# EAGLE board node5 (EAGLE 5.10)
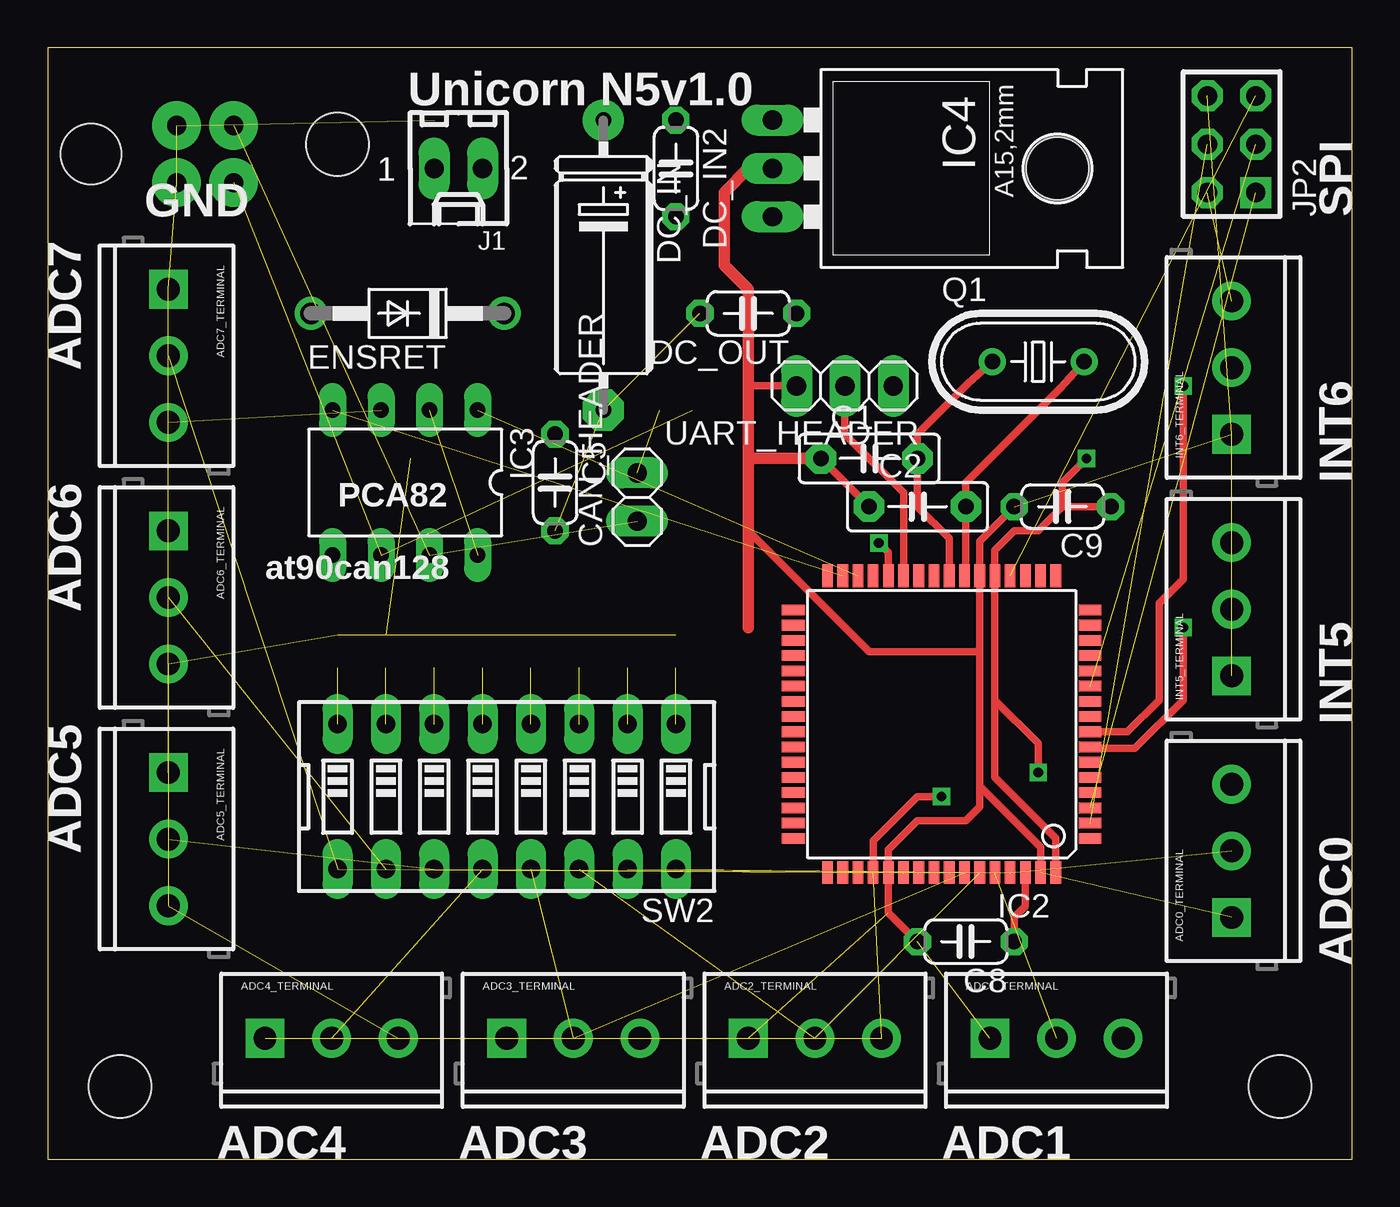
[diagram p0: board, top side]
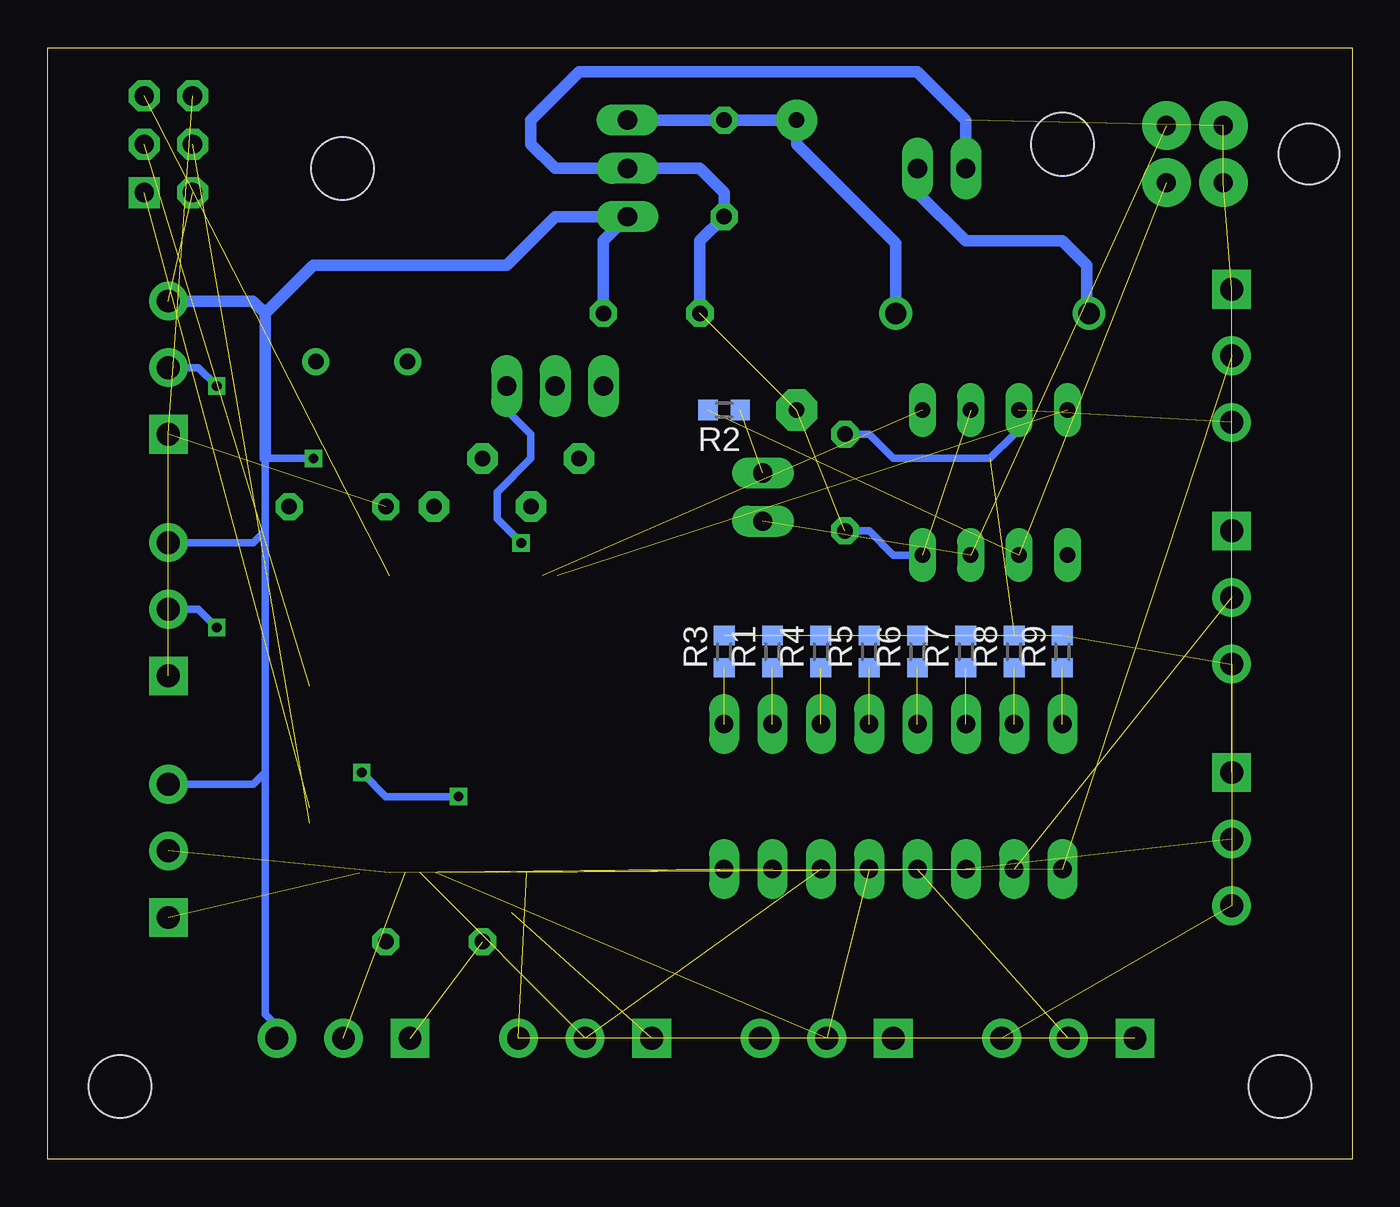
[diagram p1: board, bottom side, seen from below]

Size 68.58 x 58.42 mm. Coordinates in mm from the lower left corner, seen from the top.
Outline: 0,0 68.58,0 68.58,58.42 0,58.42 0,0
Copper layers (1*16): Top 0.035mm / dielectric 1.5mm / Bottom 0.035mm
Design rules "default *": minimum track width 12mil, minimum drill 24mil, track to track 12mil, track to pad 12mil, pad to pad 8mil, via to via 8mil, smd to smd 8mil, copper to edge 40mil, drill to drill 8mil, minimum pad ring 12mil, minimum via ring 8mil, stop-mask expansion 4mil, vias tented up to drill 0mil, thermal gap 10mil

## Footprints (pad centres in the part's own frame; a part is rotated, then mirrored left to right if it is on the bottom)
SCREWTERMINAL-3.5MM-3 = drill 1.2 pad 2.032 square: 1 0,0 | drill 1.2 pad 2.032 round: 2 3.5,0; 3 7,0
C5B2.5 = drill 0.813 pad 1.6 octagon: 1 -2.54,0; 2 2.54,0
C050-024X044 = drill 0.813 octagon: 1 -2.54,0; 2 2.54,0
1X02 = drill 1.016 long: 1 -1.27,0; 2 1.27,0
E15-5 = drill 0.813 pad 2.159 round: + -7.62,0 | drill 0.813 pad 2.159 octagon: - 7.62,0
DO41-10 = drill 1.118 round: A 5.08,0; C -5.08,0
TQFP64 = smd 1.194 x 0.559: 1 -7.8,6; 2 -7.8,5.2; 3 -7.8,4.4; 4 -7.8,3.6; 5 -7.8,2.8; 6 -7.8,2; 7 -7.8,1.2; 8 -7.8,0.4; 9 -7.8,-0.4; 10 -7.8,-1.2; 11 -7.8,-2; 12 -7.8,-2.8; 13 -7.8,-3.6; 14 -7.8,-4.4; 15 -7.8,-5.2; 16 -7.8,-6; 33 7.8,-6; 34 7.8,-5.2; 35 7.8,-4.4; 36 7.8,-3.6; 37 7.8,-2.8; 38 7.8,-2; 39 7.8,-1.2; 40 7.8,-0.4; 41 7.8,0.4; 42 7.8,1.2; 43 7.8,2; 44 7.8,2.8; 45 7.8,3.6; 46 7.8,4.4; 47 7.8,5.2; 48 7.8,6 | smd 0.559 x 1.194: 17 -6,-7.8; 18 -5.2,-7.8; 19 -4.4,-7.8; 20 -3.6,-7.8; 21 -2.8,-7.8; 22 -2,-7.8; 23 -1.2,-7.8; 24 -0.4,-7.8; 25 0.4,-7.8; 26 1.2,-7.8; 27 2,-7.8; 28 2.8,-7.8; 29 3.6,-7.8; 30 4.4,-7.8; 31 5.2,-7.8; 32 6,-7.8; 49 6,7.8; 50 5.2,7.8; 51 4.4,7.8; 52 3.6,7.8; 53 2.8,7.8; 54 2,7.8; 55 1.2,7.8; 56 0.4,7.8; 57 -0.4,7.8; 58 -1.2,7.8; 59 -2,7.8; 60 -2.8,7.8; 61 -3.6,7.8; 62 -4.4,7.8; 63 -5.2,7.8; 64 -6,7.8
DIL08 = drill 0.813 long: 1 -3.81,-3.81; 2 -1.27,-3.81; 3 1.27,-3.81; 4 3.81,-3.81; 5 3.81,3.81; 6 1.27,3.81; 7 -1.27,3.81; 8 -3.81,3.81
78XXL = drill 1.016 long: GND 0,-3.81; IN -2.54,-3.81; OUT 2.54,-3.81 | hole 3.302: 0,11.176
6410-02 = drill 1.016 long: 1 1.27,0; 2 -1.27,0
AVR-ISP-6 = drill 1.016 square: 1 -2.54,-1.27 | drill 1.016 octagon: 2 -2.54,1.27; 3 0,-1.27; 4 0,1.27; 5 2.54,-1.27; 6 2.54,1.27
STAND-OFF = hole 3.302: 0,0
HC49U70 = drill 0.813 round: 1 -2.413,0; 2 2.413,0
R0603 = smd 1 x 1.1: 1 -0.85,0; 2 0.85,0
DIPSWITCH-08 = drill 0.97 long: 1 -8.89,-3.81; 2 -6.35,-3.81; 3 -3.81,-3.81; 4 -1.27,-3.81; 5 1.27,-3.81; 6 3.81,-3.81; 7 6.35,-3.81; 8 8.89,-3.81; 9 8.89,3.81; 10 6.35,3.81; 11 3.81,3.81; 12 1.27,3.81; 13 -1.27,3.81; 14 -3.81,3.81; 15 -6.35,3.81; 16 -8.89,3.81
MICROFIT4SOCK = drill 1 pad 2.54 round: PIN1 -2,0; PIN2 1,0; PIN3 -2,-3; PIN4 1,-3 | hole 3.2: -0.5,-7.5
1X03 = drill 1.016 long: 1 -2.54,0; 2 0,0; 3 2.54,0

## Placement (x,y rotation side)
ADC0_TERMINAL  [SCREWTERMINAL-3.5MM-3]  62.23,12.7 90 top
ADC1_TERMINAL  [SCREWTERMINAL-3.5MM-3]  49.53,6.35 0 top
ADC2_TERMINAL  [SCREWTERMINAL-3.5MM-3]  36.83,6.35 0 top
ADC3_TERMINAL  [SCREWTERMINAL-3.5MM-3]  24.13,6.35 0 top
ADC4_TERMINAL  [SCREWTERMINAL-3.5MM-3]  11.43,6.35 0 top
ADC5_TERMINAL  [SCREWTERMINAL-3.5MM-3]  6.35,20.32 270 top
ADC6_TERMINAL  [SCREWTERMINAL-3.5MM-3]  6.35,33.02 270 top
ADC7_TERMINAL  [SCREWTERMINAL-3.5MM-3]  6.35,45.72 270 top
C1  22pF  [C5B2.5]  43.18,36.83 0 top
C2  22pF  [C5B2.5]  45.72,34.29 0 top
C5  100nF  [C050-024X044]  26.67,35.56 270 top
C8  100nF  [C050-024X044]  48.26,11.43 180 top
C9  100nF  [C050-024X044]  53.34,34.29 180 top
CAN_HEADER  [1X02]  30.99,34.8 90 top
DC_IN  330uF  [E15-5]  29.21,46.99 270 top
DC_IN2  100nF  [C050-024X044]  33.02,52.07 270 top
DC_OUT  100nF  [C050-024X044]  36.83,44.45 180 top
ENSRET  1N4004  [DO41-10]  18.92,44.45 180 top
IC2  MEGA128-A  [TQFP64]  46.99,22.86 180 top
IC3  PCA82C250  [DIL08]  18.8,35.56 180 top
IC4  [78XXL]  41.91,52.07 270 top
INT5_TERMINAL  [SCREWTERMINAL-3.5MM-3]  62.23,25.4 90 top
INT6_TERMINAL  [SCREWTERMINAL-3.5MM-3]  62.23,38.1 90 top
J1  22-27-2021-02  [6410-02]  21.59,52.07 180 top
JP2  AVR-ISP-6  [AVR-ISP-6]  62.23,53.34 90 top
JP3  STAND-OFF  [STAND-OFF]  3.81,3.81 0 top
JP4  STAND-OFF  [STAND-OFF]  64.77,3.81 0 top
JP6  STAND-OFF  [STAND-OFF]  15.24,53.34 0 top
Q1  12 MHz  [HC49U70]  52.07,41.91 0 top
R1  [R0603]  30.48,26.67 90 bottom
R2  120  [R0603]  33.02,39.37 180 bottom
R3  [R0603]  33.02,26.67 90 bottom
R4  [R0603]  27.94,26.67 90 bottom
R5  [R0603]  25.4,26.67 90 bottom
R6  [R0603]  22.86,26.67 90 bottom
R7  [R0603]  20.32,26.67 90 bottom
R8  [R0603]  17.78,26.67 90 bottom
R9  [R0603]  15.24,26.67 90 bottom
SW2  [DIPSWITCH-08]  24.13,19.05 180 top
U$1  MICROFIT4  [MICROFIT4SOCK]  9.78,52.32 270 top
UART_HEADER  [1X03]  41.91,40.64 180 top

## Library data of the parts
ADC0_TERMINAL ADC1_TERMINAL ADC2_TERMINAL ADC3_TERMINAL ADC4_TERMINAL ADC5_TERMINAL ADC6_TERMINAL ADC7_TERMINAL IC4 INT5_TERMINAL INT6_TERMINAL JP3 JP4 JP6 SW2 = SparkFun
C1 C2 = capacitor-wima
C5 C8 C9 DC_IN DC_IN2 DC_OUT = rcl
CAN_HEADER UART_HEADER = pinhead
ENSRET = diode
IC2 = atmel
IC3 = micro-philips
J1 = con-molex
JP2 = avr-5
Q1 = crystal
R1-R9 = resistor
U$1 = UNICORN

## Nets
+5V: ADC0_TERMINAL.3 ADC1_TERMINAL.3 ADC2_TERMINAL.3 ADC3_TERMINAL.3 ADC4_TERMINAL.3 ADC5_TERMINAL.3 ADC6_TERMINAL.3 ADC7_TERMINAL.3 C5.1 C9.1 DC_OUT.1 IC2.21 IC2.52 IC2.64 IC3.3 IC4.OUT INT5_TERMINAL.3 INT6_TERMINAL.3 JP2.2 R1.2 R3.2 R4.2 R5.2 R6.2 R7.2 R8.2 R9.2
ADC0: ADC0_TERMINAL.2 IC2.61 SW2.16
ADC1: ADC1_TERMINAL.2 IC2.60 SW2.15
ADC2: ADC2_TERMINAL.2 IC2.59 SW2.14
ADC3: ADC3_TERMINAL.2 IC2.58 SW2.13
ADC4: ADC4_TERMINAL.2 IC2.57 SW2.12
ADC5: ADC5_TERMINAL.2 IC2.56 SW2.11
ADC6: ADC6_TERMINAL.2 IC2.55 SW2.10
ADC7: ADC7_TERMINAL.2 IC2.54 SW2.9
CANJUMP1: CAN_HEADER.1 IC3.7 U$1.PIN1
CANJUMP2: CAN_HEADER.2 R2.1
INT5: IC2.7 INT5_TERMINAL.2
INT6: IC2.8 INT6_TERMINAL.2
INT7: IC2.9
MISO/TXD0: IC2.3 JP2.1
MOSI/RXD0: IC2.2 JP2.4
N$1: C1.2 IC2.24 Q1.1
N$2: C2.2 IC2.23 Q1.2
N$3: R1.1 SW2.2
N$4: R3.1 SW2.1
N$5: ENSRET.A J1.2
N$7: R4.1 SW2.3
N$10: C8.1 IC2.62
N$14: R5.1 SW2.4
N$15: R6.1 SW2.5
N$16: R7.1 SW2.6
N$17: R8.1 SW2.7
N$20: R9.1 SW2.8
N$51: IC3.6 R2.2 U$1.PIN2
PE: ADC0_TERMINAL.1 ADC1_TERMINAL.1 ADC2_TERMINAL.1 ADC3_TERMINAL.1 ADC4_TERMINAL.1 ADC5_TERMINAL.1 ADC6_TERMINAL.1 ADC7_TERMINAL.1 C1.1 C2.1 C5.2 C8.2 C9.2 DC_IN2.2 DC_IN.- DC_OUT.2 IC2.22 IC2.53 IC2.63 IC3.2 IC3.8 IC4.GND INT5_TERMINAL.1 INT6_TERMINAL.1 J1.1 JP2.6 U$1.PIN3 U$1.PIN4 UART_HEADER.3
RESET: IC2.20 JP2.5
RXCAN: IC2.31 IC3.4
RXD1: IC2.27 UART_HEADER.2
SCK: IC2.11 JP2.3
SCL: IC2.25
SDA: IC2.26
TXCAN: IC2.30 IC3.1
TXD1: IC2.28 UART_HEADER.1
VCC: DC_IN2.1 DC_IN.+ ENSRET.C IC4.IN

## Tracks (layer width: path | path; a pad name or v marks a point on that pad's centre or on a via)
+5V  (via drill 0.51)  (16 unrouted)
  Top 0.406: 53.34,34.29 52.07,33.02 50.8,33.02 49.79,32.01 IC2.21 49.79,24.13 | 53.34,34.29 C9.1 | 53.34,34.29 53.34,35.56 v54.61,36.83 | IC2.64 52.99,16.86 49.79,20.06 49.79,24.13 | IC2.52 43.39,16.72 45.72,19.05 v46.99,19.05 | v52.07,20.32 52.07,21.85 49.79,24.13
  Bottom 0.406: C5.1 25.4,38.1 24.13,36.83 19.05,36.83 17.78,38.1 17.78,39.12 IC3.3 | v54.61,36.83 57.15,36.83 57.15,33.02 | v46.99,19.05 50.8,19.05 v52.07,20.32 | INT5_TERMINAL.3 57.77,32.4 57.15,33.02 | ADC0_TERMINAL.3 57.77,19.7 57.15,20.32 | 57.15,33.02 57.15,20.32 | ADC1_TERMINAL.3 56.53,7 57.15,7.62 57.15,20.32
  Bottom 0.61: DC_OUT.1 39.37,48.26 IC4.OUT 41.91,49.53 44.45,46.99 54.61,46.99 57.15,44.45 | 57.15,36.83 57.15,44.45 | INT6_TERMINAL.3 57.8,45.1 57.15,44.45
ADC0  (2 unrouted)
ADC1  (2 unrouted)
ADC2  (2 unrouted)
ADC3  (2 unrouted)
ADC4  (2 unrouted)
ADC5  (2 unrouted)
ADC6  (2 unrouted)
ADC7  (2 unrouted)
CANJUMP1  (2 unrouted)
CANJUMP2  (1 unrouted)
INT5  (via drill 0.51)
  Top 0.406: v59.69,27.94 59.69,24.13 57.15,21.59 54.86,21.59 IC2.7
  Bottom 0.406: INT5_TERMINAL.2 60.65,28.9 v59.69,27.94
INT6  (via drill 0.51)
  Top 0.406: v59.69,40.64 59.69,30.48 58.42,29.21 58.42,24.13 56.75,22.46 IC2.8
  Bottom 0.406: INT6_TERMINAL.2 60.65,41.6 v59.69,40.64
MISO/TXD0  (1 unrouted)
MOSI/RXD0  (1 unrouted)
N$1
  Top 0.406: IC2.24 47.39,32.62 45.72,34.29 C1.2 45.72,38.1 48.39,40.77 Q1.1
N$2
  Top 0.406: IC2.23 48.26,30.73 C2.2 48.26,35.56 53.21,40.51 Q1.2
N$3  (1 unrouted)
N$4  (1 unrouted)
N$5
  Bottom 0.61: J1.2 22.86,50.8 20.32,48.26 15.24,48.26 13.97,46.99 13.97,44.58 ENSRET.A
N$7  (1 unrouted)
N$10
  Top 0.406: IC2.62 51.39,13.29 50.8,12.7 C8.1
N$14  (1 unrouted)
N$15  (1 unrouted)
N$16  (1 unrouted)
N$17  (1 unrouted)
N$20  (1 unrouted)
N$51  (2 unrouted)
PE  (16 unrouted)
  Top 0.406: C1.1 C2.1 | C8.2 44.19,12.96 IC2.53 44.19,16.25 45.72,17.78 48.26,17.78 48.99,18.51 48.99,19.59 | C9.2 48.99,32.48 IC2.22 48.99,26.67 | IC2.63 52.19,16.39 48.99,19.59 | 48.99,19.59 48.99,26.67 | 36.83,33.02 43.18,26.67 48.99,26.67 | 36.83,40.64 UART_HEADER.3
  Top 0.61: IC4.GND 36.83,52.07 35.56,50.8 35.56,46.99 36.83,45.72 36.83,40.64 36.83,36.83 | 36.83,36.83 C1.1 | 36.83,36.83 36.83,33.02 36.83,27.94
  Bottom 0.406: C5.2 25.4,33.02 24.13,31.75 IC3.8
  Bottom 0.61: J1.1 20.32,54.61 22.86,57.15 40.64,57.15 43.18,54.61 43.18,53.34 41.91,52.07 IC4.GND 34.29,52.07 33.02,50.8 DC_IN2.2 34.29,48.26 DC_OUT.2
RESET  (1 unrouted)
RXCAN  (1 unrouted)
RXD1
  Top 0.406: UART_HEADER.2 41.91,38.1 44.99,35.02 IC2.27
SCK  (1 unrouted)
TXCAN  (1 unrouted)
TXD1  (via drill 0.51)
  Top 0.406: IC2.28 44.19,31.88 v43.69,32.38
  Bottom 0.406: UART_HEADER.1 44.45,39.37 43.18,38.1 43.18,36.83 44.96,35.05 44.96,33.66 v43.69,32.38
VCC
  Bottom 0.61: IC4.IN DC_IN2.1 DC_IN.+ 29.21,53.34 24,48.13 ENSRET.C

## Text on the board
tPlace: Unicorn N5v1.0 | GND | SPI | ADC7 | ADC6 | INT6 | PCA82 | at90can128 | ADC5 | INT5 | ADC0 | ADC4 | ADC3 | ADC2 | ADC1